# EAGLE board Ocreeb MK 2 _core _pcb (EAGLE 9.7.0)
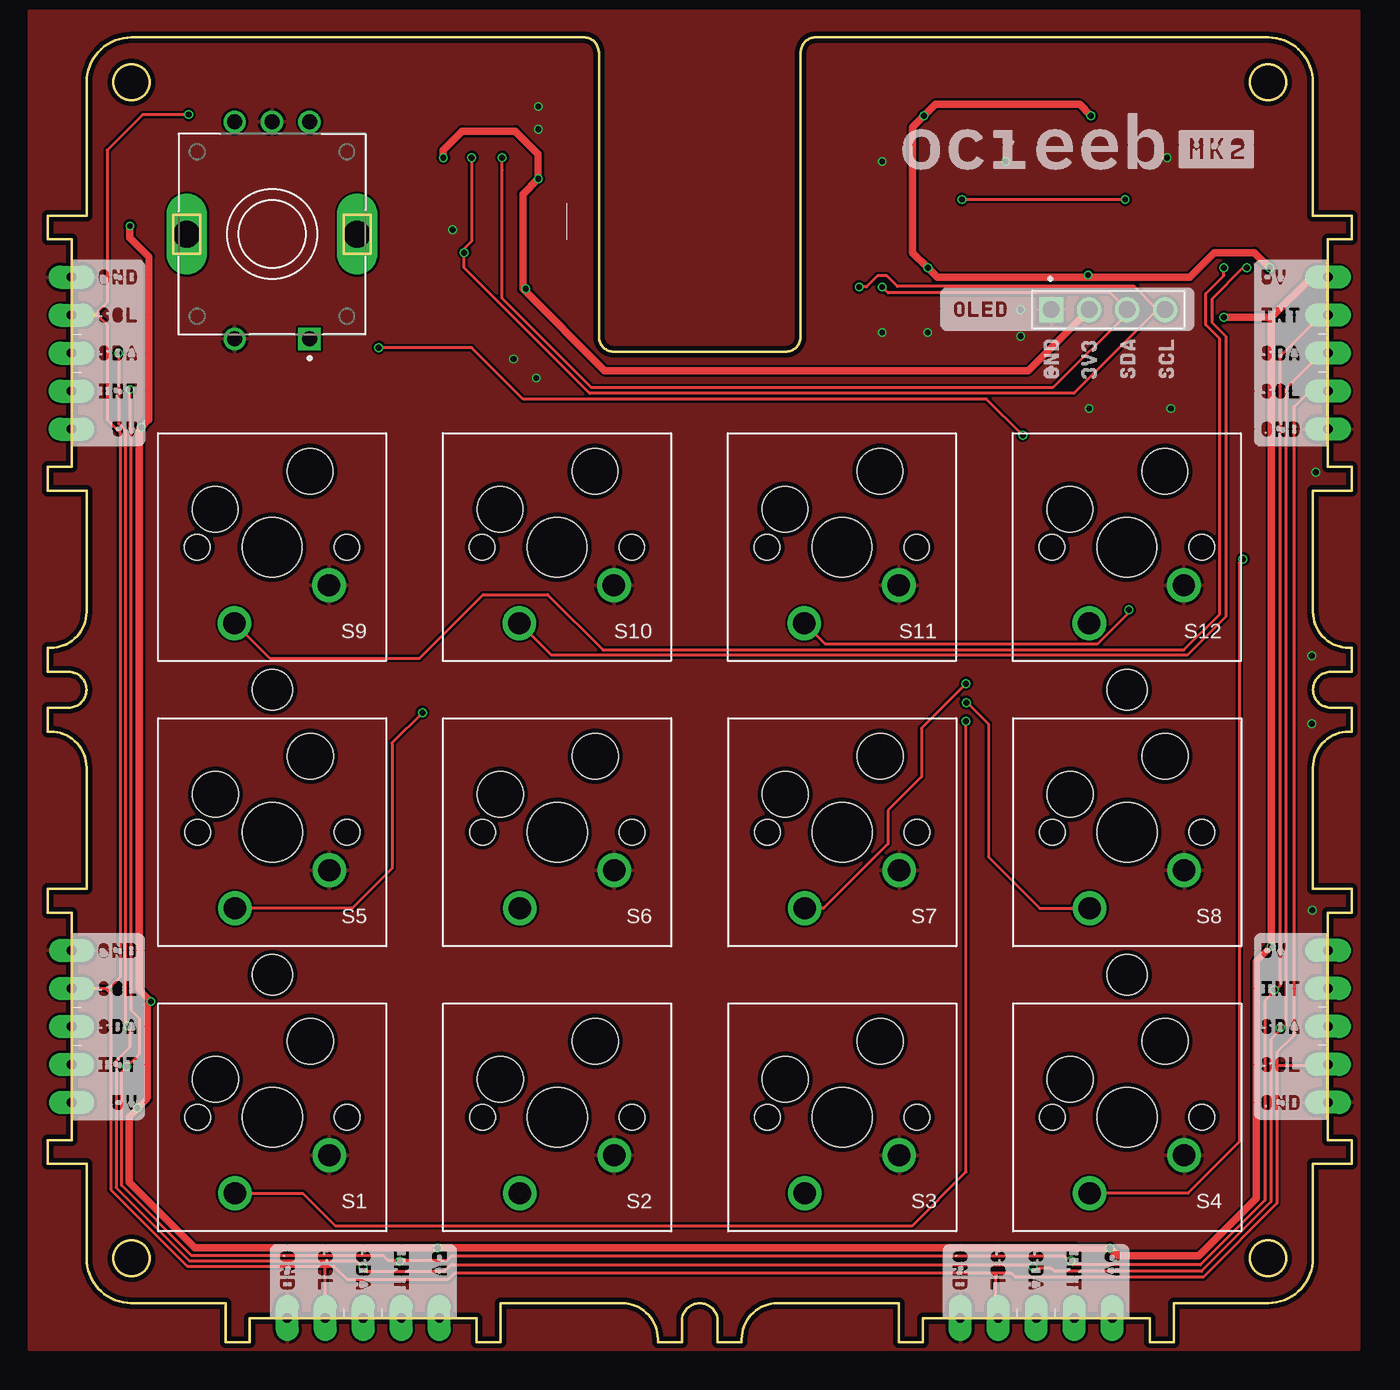
[diagram p0: board, top side]
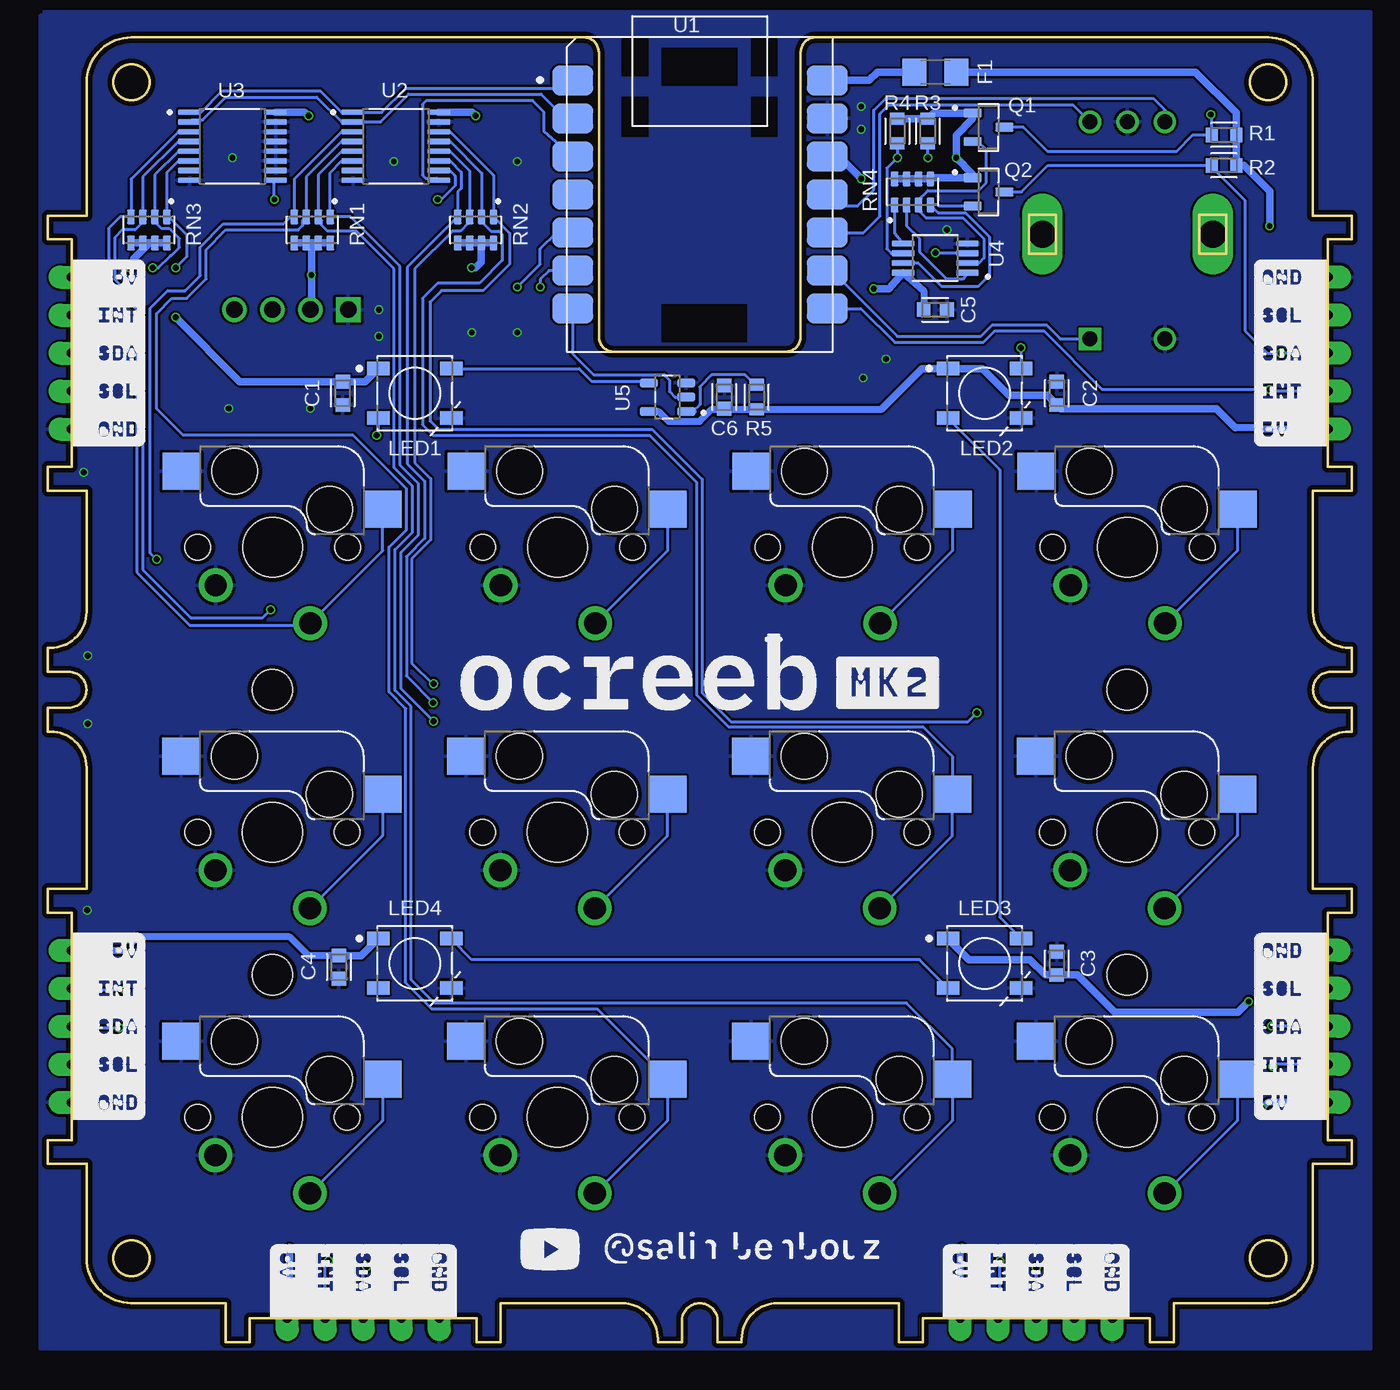
[diagram p1: board, bottom side, seen from below]

Size 87.2 x 87.2 mm. Coordinates in mm from the lower left corner, seen from the top.
Outline: 19.8,72.75 19.8,75.36 21.61,75.36 21.61,72.75 19.8,72.75
Outline: 8.41,72.75 8.41,75.36 10.2,75.36 10.2,72.75 8.41,72.75
Outline: 2.6,38.4 2.6,30.3 0,30.3 0,28.7 1.6,28.7 1.6,13.51 0,13.51 0,11.91 2.6,11.91 2.6,5.6 arc90 5.6,2.6 11.91,2.6 11.91,0 13.51,0 13.51,1.6 28.7,1.6 28.7,0 30.3,0 30.3,2.6 38.4,2.6 arc-90 40.8,0.2 40.8,0 42.4,0 42.4,1.4 arc-180 44.8,1.4 44.8,0 46.4,0 46.4,0.2 arc-90 48.8,2.6 56.91,2.6 56.91,0 58.51,0 58.51,1.6 73.69,1.6 73.69,0 75.3,0 75.3,2.6 81.6,2.6 arc90 84.6,5.6 84.6,11.91 87.2,11.91 87.2,13.51 85.6,13.51 85.6,28.7 87.2,28.7 87.2,30.3 84.6,30.3 84.6,38.4 arc-90 87,40.8 87.2,40.8 87.2,42.4 85.8,42.4 arc-180 85.8,44.8 87.2,44.8 87.2,46.4 87,46.4 arc-90 84.6,48.8 84.6,56.91 87.2,56.91 87.2,58.51 85.6,58.51 85.6,73.69 87.2,73.69 87.2,75.3 84.6,75.3 84.6,84.2 arc90 81.6,87.2 51.35,87.2 arc90 50.35,86.2 50.35,67.2 arc-90 49.35,66.2 37.85,66.2 arc-90 36.85,67.2 36.85,86.2 arc90 35.85,87.2 5.6,87.2 arc90 2.6,84.2 2.6,75.3 0,75.3 0,73.69 1.6,73.69 1.6,58.51 0,58.51 0,56.91 2.6,56.91 2.6,48.8 arc-90 0.2,46.4 0,46.4 0,44.8 1.4,44.8 arc-180 1.4,42.4 0,42.4 0,40.8 0.2,40.8 arc-90 2.6,38.4
Outline: circle at 5.6,5.6 radius 1.2
Outline: circle at 5.6,84.2 radius 1.2
Outline: circle at 81.6,5.6 radius 1.2
Outline: circle at 81.6,84.2 radius 1.2
Copper layers (1*16): Top 0.035mm / dielectric 1.5mm / Bottom 0.035mm
Design rules "PCBWay_2L_100um-Track *": minimum track width 0.1mm, minimum drill 0.3mm, track to track 0.1mm, track to pad 0.1mm, pad to pad 0.1mm, via to via 0.1mm, smd to smd 0mil, copper to edge 0.3mm, drill to drill 10mil, minimum pad ring 6mil, minimum via ring 0.1mm, stop-mask expansion 2mil, vias tented up to drill 0.45mm, thermal gap 0.2mm
Net classes: 0 default: width 0.203 mm, drill 0.381 mm, clearance 0.152 mm; 1 power: width 0.457 mm, drill 0.381 mm, clearance 0.152 mm
Holes 2.7 mm at 72.17,43.6 15.03,43.6 15.03,24.55 72.17,24.55

## Footprints (pad centres in the part's own frame; a part is rotated, then mirrored left to right if it is on the bottom)
CAPC1608X85 = smd 0.921 x 0.97: 1 -0.775,0; 2 0.775,0
PEC11R-4215F-S0024 = drill 1 square: 1 -2.5,7 | drill 1: 2 2.5,7; A -2.5,-7.5; B 2.5,-7.5; C 0,-7.5 | drill 1.8 long: P1 -5.7,0; P2 5.7,0
1206 = smd 1.6 x 1.8: 1 -1.4,0; 2 1.4,0
WS2812B = smd 1.5 x 0.9: 1 -2.45,1.65; 2 -2.45,-1.65; 3 2.45,-1.65; 4 2.45,1.65
61300411121 = drill 1.1 square: 1 -3.81,0 | drill 1.1: 2 -1.27,0; 3 1.27,0; 4 3.81,0
SOT95P240X111-3N = smd 1.23 x 0.6: 1 -1.06,0.95; 2 -1.06,-0.95; 3 1.06,0
RESC1608X60 = smd 0.799 x 0.974: 1 -0.815,0; 2 0.815,0
RESCAF80P320X160X60-8N = smd 0.97 x 0.53: 1 -0.875,1.2; 2 -0.875,0.4; 3 -0.875,-0.4; 4 -0.875,-1.2; 5 0.875,-1.2; 6 0.875,-0.4; 7 0.875,0.4; 8 0.875,1.2
CHERRY_MX1A-11NN_SWITCH = smd 2.55 x 2.5 bottom: 1 -6.09,-5.08; 2 7.36,-2.54 | drill 1.5: 1_ALT -3.81,2.54; 2_ALT 2.51,5.08 | hole 3.988: 0,0 | hole 1.7: 5,0; -5,0 | hole 3.048: -2.54,-5.08; 3.81,-2.54
MOUDLE14P-SMD-2.54-21X17.8MM = smd 2.75 x 2: 1 0.403,18.12; 2 0.403,15.58; 3 0.403,13.04; 4 0.403,10.5; 5 0.403,7.96; 6 0.403,5.42; 7 0.403,2.88; 8 17.432,2.88; 9 17.432,5.42; 10 17.432,7.96; 11 17.432,10.5; 12 17.432,13.04; 13 17.432,15.58; 14 17.432,18.12
SOP65P640X120-16N = smd 1.524 x 0.381: 1 -2.87,2.275; 2 -2.87,1.625; 3 -2.87,0.975; 4 -2.87,0.325; 5 -2.87,-0.325; 6 -2.87,-0.975; 7 -2.87,-1.625; 8 -2.87,-2.275; 9 2.87,-2.275; 10 2.87,-1.625; 11 2.87,-0.975; 12 2.87,-0.325; 13 2.87,0.325; 14 2.87,0.975; 15 2.87,1.625; 16 2.87,2.275
SOP65P490X110-8N = smd 1.524 x 0.419: 1 -2.15,0.975; 2 -2.15,0.325; 3 -2.15,-0.325; 4 -2.15,-0.975; 5 2.15,-0.975; 6 2.15,-0.325; 7 2.15,0.325; 8 2.15,0.975
SOT95P280X145-5N = smd 1.21 x 0.59: 1 -1.255,0.95; 2 -1.255,0; 3 -1.255,-0.95; 4 1.255,-0.95; 5 1.255,0.95
5_POGO_EDGE = drill 0.65 pad 1.524 long: 1 -5.08,0; 2 -2.54,0; 3 0,0; 4 2.54,0; 5 5.08,0

## Placement (x,y rotation side)
C1  0.1uF  [CAPC1608X85]  67.48,63.41 90 bottom
C2  0.1uF  [CAPC1608X85]  19.72,63.41 270 bottom
C3  0.1uF  [CAPC1608X85]  19.72,25.31 270 bottom
C4  0.1uF  [CAPC1608X85]  67.73,25.06 90 bottom
C5  0.1uF  [CAPC1608X85]  27.85,69 180 bottom
C6  0.1uF  [CAPC1608X85]  41.96,63.16 270 bottom
ENC  PEC11R-4215F-S0024  [PEC11R-4215F-S0024]  15.01,74.05 180 top
F1  6V/0.75A  [1206]  27.85,84.88 0 bottom
LED1  WS2812B  [WS2812B]  62.65,63.41 0 bottom
LED2  WS2812B  [WS2812B]  24.55,63.41 0 bottom
LED3  WS2812B  [WS2812B]  24.55,25.31 0 bottom
LED4  WS2812B  [WS2812B]  62.65,25.31 0 bottom
OLED  61300411121  [61300411121]  70.91,69 0 top
Q1  BSS138  [SOT95P240X111-3N]  24.3,81.19 0 bottom
Q2  BSS138  [SOT95P240X111-3N]  24.3,76.87 0 bottom
R1  10K  [RESC1608X60]  8.55,80.68 0 bottom
R2  10K  [RESC1608X60]  8.55,78.65 0 bottom
R3  10K  [RESC1608X60]  28.36,80.94 90 bottom
R4  10K  [RESC1608X60]  30.39,80.94 90 bottom
R5  10K  [RESC1608X60]  39.79,63.16 270 bottom
RN1  CAY16-103J4LF  [RESCAF80P320X160X60-8N]  69.51,74.33 270 bottom
RN2  CAY16-103J4LF  [RESCAF80P320X160X60-8N]  58.59,74.33 270 bottom
RN3  CAY16-103J4LF  [RESCAF80P320X160X60-8N]  80.43,74.33 270 bottom
RN4  CAY16-103J4LF  [RESCAF80P320X160X60-8N]  29.38,76.87 90 bottom
S1  MX1A-11NN  [CHERRY_MX1A-11NN_SWITCH]  15.03,15.03 180 top
S2  MX1A-11NN  [CHERRY_MX1A-11NN_SWITCH]  34.08,15.03 180 top
S3  MX1A-11NN  [CHERRY_MX1A-11NN_SWITCH]  53.12,15.03 180 top
S4  MX1A-11NN  [CHERRY_MX1A-11NN_SWITCH]  72.17,15.03 180 top
S5  MX1A-11NN  [CHERRY_MX1A-11NN_SWITCH]  15.03,34.08 180 top
S6  MX1A-11NN  [CHERRY_MX1A-11NN_SWITCH]  34.08,34.08 180 top
S7  MX1A-11NN  [CHERRY_MX1A-11NN_SWITCH]  53.12,34.08 180 top
S8  MX1A-11NN  [CHERRY_MX1A-11NN_SWITCH]  72.17,34.08 180 top
S9  MX1A-11NN  [CHERRY_MX1A-11NN_SWITCH]  15.01,53.12 180 top
S10  MX1A-11NN  [CHERRY_MX1A-11NN_SWITCH]  34.05,53.12 180 top
S11  MX1A-11NN  [CHERRY_MX1A-11NN_SWITCH]  53.11,53.12 180 top
S12  MX1A-11NN  [CHERRY_MX1A-11NN_SWITCH]  72.16,53.12 180 top
U1  [MOUDLE14P-SMD-2.54-21X17.8MM]  52.5,66.2 0 bottom
U2  SN74HC165DBR16-TSSOP  [SOP65P640X120-16N]  63.92,79.92 0 bottom
U3  SN74HC165DBR16-TSSOP  [SOP65P640X120-16N]  74.84,79.92 0 bottom
U4  TCA4307DGKR  [SOP65P490X110-8N]  27.85,72.44 180 bottom
U5  SN74AHCT1G126DBVR  [SOT95P280X145-5N]  45.76,63.16 180 bottom
U$1  5PIN_EDGE  [5_POGO_EDGE]  1.6,66.1 90 top
U$2  5PIN_EDGE  [5_POGO_EDGE]  1.61,21.1 90 top
U$3  5PIN_EDGE  [5_POGO_EDGE]  85.6,21.1 270 top
U$4  5PIN_EDGE  [5_POGO_EDGE]  21.1,1.6 180 top
U$5  5PIN_EDGE  [5_POGO_EDGE]  66.1,1.6 180 top
U$6  5PIN_EDGE  [5_POGO_EDGE]  85.6,66.1 270 top

## Library data of the parts
C1-C6 = Capacitor; CATEGORY: Capacitor
ENC = Switch; CREATED_BY: PCBLayout.com; DIGIKEY_PART_NUMBER: PEC11R-4215F-S0024-ND; MANUFACTURER: Bourns Inc.; MPN: PEC11R-4215F-S0024
F1 = SparkFun-Fuses; PROD_ID: RES-11150
LED1-LED4 = WS2812B; CATEGORY: LED; COLOR: RGB; DESCRIPTION: LED integrated light source; MANUFACTURER: Worldsemi; MPN: WS2812B; OPERATING_TEMP: -25 ℃ to +80℃(TJ); PART_STATUS: Active; SUB_CATEGORY: RGB
OLED = Headers; CREATED_BY: PCBLayout.com; DIGI_KEY_PART_NUMBER: 732-5317-ND; MANUFACTURER: Wurth Electronics Inc.; MPN: 61300411121
Q1 Q2 = BSS138; AVAILABILITY: In Stock; CHECK_PRICES: https://www.snapeda.com/parts/BSS138/Onsemi/view-part/?ref=eda; DESCRIPTION: N-Channel 50 V 220mA (Ta) 360mW (Ta) Surface Mount SOT-23-3; MF: onsemi; MP: BSS138; PACKAGE: None; PRICE: None; SNAPEDA_LINK: https://www.snapeda.com/parts/BSS138/Onsemi/view-part/?ref=snap
R1-R5 = Resistor; CATEGORY: Resistor; SUB-CATEGORY: Fixed
RN1-RN4 = CAY16-103J4LF; CHECK_PRICES: https://www.snapeda.com/parts/CAY16-103J4LF/Bourns+-+J.W.+Miller/view-part/?ref=eda; DESCRIPTION: Resistor, Chip Array,10 Kilohms,62 mW,+ 5%,50 V (Max.) | Bourns CAY16-103J4LF; DIGIKEY_PART_NUMBER: CAY16-103J4LFTR-ND; MF: Bourns; MP: CAY16-103J4LF; PACKAGE: 1206 Bourns; PURCHASE-URL: https://www.snapeda.com/api/url_track_click_mouser/?unipart_id=47136&manufacturer=Bourns&part_name=CAY16-103J4LF&search_term=None; SNAPEDA_LINK: https://www.snapeda.com/parts/CAY16-103J4LF/Bourns+-+J.W.+Miller/view-part/?ref=snap
S1-S12 = MX Switch; AVAILABILITY: In Stock; CHECK_PRICES: https://www.snapeda.com/parts/MX1A11NN/Cherry/view-part/?ref=eda; DESCRIPTION: SWITCH, TACTILE, SPST-NO, 10mA, THOUGH HOLE; Product Range:MX Series; Actuator Orientation:Top Actuated; Switch Mounting:Surface Mount; Actuator Style:Plunger for Cap; Actuating Force:59.5gf; Contact Rating:10mA at 12VDC RoHS Compliant: No; MF: Cherry; MP: MX1A11NN; PACKAGE: None; PRICE: None; SNAPEDA_LINK: https://www.snapeda.com/parts/MX1A11NN/Cherry/view-part/?ref=snap
U1 = XIAO RP2040
U2 U3 = ul_SN74HC165DBR
U4 = TCA4307DGKR; AVAILABILITY: In Stock; CHECK_PRICES: https://www.snapeda.com/parts/TCA4307DGKR/Texas+Instruments/view-part/?ref=eda; DESCRIPTION: 2-bit bidirectional 2.3- to 5.5-V hot swappable 400-kHz I2C/SMBus buffer with Stuck Bus Recovery; MF: Texas Instruments; MP: TCA4307DGKR; PACKAGE: None; PRICE: None; PURCHASE-URL: https://pricing.snapeda.com/search?q=TCA4307DGKR&ref=eda; SNAPEDA_LINK: https://www.snapeda.com/parts/TCA4307DGKR/Texas+Instruments/view-part/?ref=snap
U5 = SN74AHCT1G126; CHECK_PRICES: https://www.snapeda.com/parts/SN74AHCT1G126DBVR/Texas+Instruments/view-part/?ref=eda; DESCRIPTION: Single 4.5-V to 5.5-V buffer with TTL-compatible CMOS inputs and 3-state outputs; DIGIKEY_PART_NUMBER: 296-4710-2-ND; MF: Texas Instruments; MP: SN74AHCT1G126DBVR; PACKAGE: SOT-23-5 Texas Instruments; PURCHASE-URL: https://www.snapeda.com/api/url_track_click_mouser/?unipart_id=420895&manufacturer=Texas Instruments&part_name=SN74AHCT1G126DBVR&search_term=None; SNAPEDA_LINK: https://www.snapeda.com/parts/SN74AHCT1G126DBVR/Texas+Instruments/view-part/?ref=snap
U$1-U$6 = OCREEB_POGO_CON

## Nets
3.3V [power]: C5.2 OLED.2 Q1.1 Q2.1 R3.2 R4.2 RN1.5 RN1.6 RN1.7 RN1.8 RN2.5 RN2.6 RN2.7 RN2.8 RN3.5 RN3.6 RN3.7 RN3.8 RN4.5 RN4.6 RN4.7 RN4.8 U1.12 U2.16 U3.16 U4.8
5V [power]: C1.2 C2.2 C3.2 C4.2 C6.2 F1.2 LED1.1 LED2.1 LED3.1 LED4.1 R1.2 R2.2 R5.2 U5.5 U$1.1 U$2.1 U$3.1 U$4.1 U$5.1 U$6.1
CLK: U1.2 U2.2 U3.2
ENC_A: ENC.A U1.10
ENC_B: ENC.B U1.11
ENC_SW: ENC.1 U1.9
GND [power]: C1.1 C2.1 C3.1 C4.1 C5.1 C6.1 ENC.2 ENC.C LED1.3 LED2.3 LED3.3 LED4.3 OLED.1 S1.1 S1.1_ALT S2.1 S2.1_ALT S3.1 S3.1_ALT S4.1 S4.1_ALT S5.1 S5.1_ALT S6.1 S6.1_ALT S7.1 S7.1_ALT S8.1 S8.1_ALT S9.1 S9.1_ALT S10.1 S10.1_ALT S11.1 S11.1_ALT S12.1 S12.1_ALT U1.13 U2.8 U2.15 U3.8 U3.10 U3.11 U3.12 U3.13 U3.14 U3.15 U4.4 U5.3 U$1.5 U$2.5 U$3.5 U$4.5 U$5.5 U$6.5
INTR: U1.8 U$1.2 U$2.2 U$3.2 U$4.2 U$5.2 U$6.2
LD: U1.1 U2.1 U3.1
N$1: RN4.1 U4.5
N$2: R5.1 U5.1
N$3: LED1.2 LED2.4
N$12: LED2.2 LED3.4
N$13: LED3.2 LED4.4
N$15: RN4.2 U4.1
PIXEL: U1.7 U5.2
PIXEL_5V: LED1.4 U5.4
SCL: OLED.4 R3.1 U1.6 U4.3
SCL_OUT: Q1.2 RN4.3 U4.2
SCL_OUT_5V: Q1.3 R1.1 U$1.4 U$2.4 U$3.4 U$4.4 U$5.4 U$6.4
SDA: OLED.3 R4.1 U1.5 U4.6
SDA_OUT: Q2.2 RN4.4 U4.7
SDA_OUT_5V: Q2.3 R2.1 U$1.3 U$2.3 U$3.3 U$4.3 U$5.3 U$6.3
SER: U2.10 U3.9
SH_DATA: U1.3 U2.9
SW1: RN1.1 S1.2 S1.2_ALT U2.6
SW2: RN1.2 S2.2 S2.2_ALT U2.5
SW3: RN1.3 S3.2 S3.2_ALT U2.4
SW4: RN1.4 S4.2 S4.2_ALT U2.3
SW5: RN2.1 S5.2 S5.2_ALT U2.14
SW6: RN2.2 S6.2 S6.2_ALT U2.13
SW7: RN2.3 S7.2 S7.2_ALT U2.12
SW8: RN2.4 S8.2 S8.2_ALT U2.11
SW9: RN3.1 S9.2 S9.2_ALT U3.6
SW10: RN3.2 S10.2 S10.2_ALT U3.5
SW11: RN3.3 S11.2 S11.2_ALT U3.4
SW12: RN3.4 S12.2 S12.2_ALT U3.3
USB_5V [power]: F1.1 U1.14

## Tracks (layer width: path | path; a pad name or v marks a point on that pad's centre or on a via)
3.3V  (via drill 0.38, 0.4)
  Top 0.508: v81.7,71.79 80.68,72.81 78.02,72.81 76.37,71.16 69.56,71.16 | 69.56,71.16 59.48,71.16 v58.84,71.79 57.82,72.81 57.82,81.19 v58.59,81.95 59.35,82.72 69,82.72 v69.76,81.95 | OLED.2 65.57,64.94 37.25,64.94 31.79,70.4 | v26.46,79.16 26.46,79.67 27.73,80.94 31.26,80.94 32.8,79.4 v32.8,77.75 31.79,76.73 31.79,70.4 | v69.56,71.31 69.56,71.16 | 31.79,70.4 v31.97,70.4
  Bottom 0.457: U4.8 28.61,70.23 28.61,69.02 C5.2 | Q2.1 25.36,78.06
  Bottom 0.508: R4.2 R3.2 27.97,82.14 Q1.1 25.36,81.76 26.46,80.66 v26.46,79.16 25.36,78.06 | RN3.7 RN3.5 RN3.6 | RN3.7 RN3.8 | Q2.1 28.1,77.82 RN4.5 RN4.6 RN4.8 RN4.7 | v58.84,71.79 58.59,71.79 58.2,72.17 58.2,73.46 RN2.7 | 69.56,73.46 RN1.5 RN1.6 | RN1.8 RN1.7 69.56,73.46 | RN2.7 RN2.8 | RN2.7 RN2.5 RN2.6 | v81.7,71.79 81.45,72.05 81.45,72.4 80.38,73.46 RN3.7 | U3.16 70,82.2 v69.76,81.95 | U2.16 58.83,82.2 v58.59,81.95 | U1.12 34.94,79.11 34.17,79.11 v32.8,77.75 | 69.56,73.46 v69.56,71.31 69.56,69.7 69.64,69.64 OLED.2 | v31.97,70.4 30.95,70.4 U4.8
5V  (via drill 0.38, 0.4)
  Top 0.457: 6.77,72.56 6.77,61.63 v6.26,61.13 | v6.01,15.64 6.64,16.27 6.64,22.52 v6.9,22.77 6.11,23.56 6.11,23.61 | 5.44,15.07 v6.01,15.64 | v6.01,15.64 | 80.82,25.45 v81.81,26.44
  Top 0.508: 81.83,68.49 81.83,64.12 81.81,64.11 v81.81,26.44 | 6.77,72.56 5.5,73.83 v5.5,74.59 | U$6.1 84.52,71.18 81.83,68.49 | v78.65,68.49 81.83,68.49 | v6.26,61.13 6.11,60.97 6.11,23.61 | 5.44,15.07 5.44,10.69 9.84,6.29 v26.07,6.29 68.77,6.29 68.81,6.26 v71.03,6.26 71.54,5.75 76.95,5.75 80.82,9.62 80.82,25.45
  Bottom 0.457: 31.42,62.38 31.46,62.34 R5.2 42.01,62.34 42.8,62.34 43.6,61.53 45.69,61.53 46.36,62.21 U5.5 | U$1.1 6.16,61.02 v6.26,61.13 7.79,61.13 | U$2.1 5.63,16.02 v6.01,15.64 | U$4.1 26.18,6.19 v26.07,6.29 | C4.2 69.75,25.83 69.76,25.82 71.03,27.09 81.17,27.09 v81.81,26.44 82.08,26.18 U$3.1
  Bottom 0.508: C4.2 66.23,25.83 LED4.1 | LED1.1 65.97,64.19 C1.2 74.35,64.19 v78.65,68.49 | LED3.1 25.6,25.57 21.52,25.57 20.49,24.54 C3.2 18.36,24.54 15.86,22.03 7.63,22.03 v6.9,22.77 | 31.42,62.38 28.74,65.06 LED2.1 24.71,65.06 22.92,63.27 20.36,63.27 C2.2 19.48,62.4 9.06,62.4 7.79,61.13 | U$5.1 71.03,1.75 v71.03,6.26 | C6.2 42.01,62.34 | F1.2 10.45,84.88 7.73,82.16 R1.2 R2.2 7.23,78.65 5.5,76.93 v5.5,74.59
CLK
  Bottom 0.203: U3.2 77.57,81.69 76.83,81.69 75.3,83.22 69.21,83.22 67.55,81.55 U2.2 64.93,81.55 63.07,83.41 54.2,83.41 52.32,81.53 U1.2
ENC_A
  Bottom 0.203: U1.10 32.66,74.16 31.55,75.26 31.55,82.09 30.95,82.7 18.65,82.7 ENC.A
ENC_B
  Bottom 0.203: ENC.B 12.51,82.36 13.28,83.13 31.16,83.13 31.96,82.33 31.96,77.03 33.05,75.94 34.31,75.94 U1.11
ENC_SW
  Bottom 0.203: U1.9 34.99,71.54 34.71,71.54 30.39,67.22 24.8,67.22 24.04,67.98 20.42,67.98 19.49,67.06 ENC.1
GND  (via drill 0.38, 0.4)
  other vias: 84.54,28.87 84.51,41.31 84.51,45.89 84.8,58.12 64.05,78.91 74.84,79.16 55.79,78.91 27.09,74.33 65.06,67.22 65.06,69 69.64,62.4 75.1,62.4 31.15,65.7 32.68,64.43 55.79,67.48 58.84,67.48 32.8,82.59 32.8,81.06
  pour Bottom: 87.69,-0.49 87.69,88.71 87.52,88.71 87.48,88.73 87.46,88.75 87.44,88.79 87.44,88.96 -1.26,88.96 -1.26,-0.49
  pour Top: -1.26,-0.49 87.69,-0.49 87.69,88.96 -1.26,88.96
INTR  (via drill 0.38, 0.4)
  Top 0.203: U$6.2 85.17,68.64 82.39,65.86 82.39,63.89 82.37,63.88 82.37,23.8 82.08,23.51 | 23.53,5.45 22.77,5.45 22.44,5.79 9.63,5.79 4.94,10.48 4.94,18.06 v5.29,18.41 6.11,19.24 6.11,21.65 5.55,22.21 5.55,61.07 5.5,61.12 v5.5,63.67 | 82.08,23.51 82.08,23.5 81.38,22.8 81.38,9.46 77.08,5.16 68.56,5.16 68.42,5.3 | 82.08,23.51 82.05,23.53 v82.02,23.53 | 23.53,5.45 26.67,5.45 26.96,5.75 67.97,5.75 68.42,5.3 | 23.53,5.45 v23.53,5.4 | 68.42,5.3 v68.42,5.43
  Bottom 0.203: U$3.2 85.49,23.53 v82.02,23.53 | U$5.2 68.64,5.26 68.5,5.4 68.45,5.4 v68.42,5.43 | U$4.2 23.53,1.71 v23.53,5.4 | U1.8 32.83,69.08 30.56,66.82 24.64,66.82 23.87,67.58 20.59,67.58 16.68,63.67 v5.5,63.67 5.39,63.56 U$1.2 | U$2.2 5.14,18.56 v5.29,18.41
LD
  Bottom 0.203: U3.1 76.95,82.2 75.53,83.62 68.98,83.62 67.55,82.2 U2.1 64.86,82.2 63.23,83.82 52.34,83.82 U1.1
N$1
  Bottom 0.203: RN4.1 30.55,75.97 30.55,74.09 U4.5
N$2
  Bottom 0.203: 44.04,62.21 43.6,62.65 43.6,63.85 42.8,64.65 40.59,64.65 39.92,63.97 R5.1
  Bottom 0.457: 44.04,62.21 U5.1
N$3  (via drill 0.4)
  Top 0.203: v65.19,60.62 62.78,63.03 31.79,63.03 28.36,66.46 v22.14,66.46
  Bottom 0.203: LED1.2 65.1,60.71 v65.19,60.62 | v22.14,66.46 22.1,66.42 LED2.4
N$12
  Bottom 0.203: LED2.2 23.53,58.3 23.53,28.4 LED3.4
N$13
  Bottom 0.203: LED4.4 60.2,26.93 58.84,25.57 28.9,25.57 LED3.2
N$15
  Bottom 0.203: U4.1 25.98,71.06 27.11,71.06 28.89,72.84 28.89,73.73 29.75,74.59 29.75,75.97 RN4.2
PIXEL
  Bottom 0.203: U5.2 45.25,63.16 45.63,63.54 45.63,64.3 45.99,64.66 50.69,64.66 52.1,66.07 U1.7
PIXEL_5V
  Bottom 0.203: LED1.4 51.67,65.06 50.84,64.23 47.14,64.23 U5.4
SCL  (via drill 0.38, 0.4)
  Top 0.203: 74.21,69 68.62,63.41 36.23,63.41 27.85,71.79 v27.85,72.81 27.85,73.08 28.35,73.58 v28.35,79.15 v28.36,79.16 | OLED.4 74.21,69 | 74.21,69 72.64,70.57 56.81,70.57 56.11,71.26 55.49,71.26 54.75,70.52 v54.27,70.52
  Bottom 0.203: v28.36,79.16 R3.1 | v27.85,72.81 25.62,72.81 U4.3 | v54.27,70.52 54.27,71.03 53.68,71.62 U1.6
SCL_OUT
  Bottom 0.203: Q1.2 25,80.24 24.44,79.68 24.44,77.5 24.97,76.96 28.36,76.96 29,76.32 29,76.02 RN4.3 29,75.97 29,75.67 28.47,75.14 25.99,75.14 24.59,73.73 24.59,72.46 24.93,72.12 U4.2
SCL_OUT_5V  (via drill 0.38)
  Top 0.203: 82.19,18.45 82.19,19.37 83.31,20.49 83.31,62.48 84.39,63.56 U$6.4 | 82.19,18.45 82.19,9.27 77.26,4.33 64.71,4.33 64.43,4.61 63.41,4.61 | 18.59,5.08 9.33,5.08 4.23,10.18 4.23,23.29 3.98,23.53 | 18.59,5.08 19.13,5.08 20.04,4.17 26.77,4.17 27.22,4.61 63.41,4.61 | U$5.4 63.41,1.75 63.41,4.61 | U$3.4 85.49,18.45 82.19,18.45 | 3.98,23.53 4.84,24.4 4.84,60.78 3.98,61.64 3.98,67.98 3.32,68.64 U$1.4 3.11,68.64 3.98,69.51 3.98,79.67 6.35,82.04 v9.43,82.04 | U$2.4 3.87,23.64 3.98,23.53 | U$4.4 18.56,5.05 18.59,5.08
  Bottom 0.203: Q1.3 21.97,81.19 20.34,79.57 11.75,79.57 10.63,80.68 R1.1 9.36,81.98 v9.43,82.04
SDA  (via drill 0.38, 0.4)
  Top 0.203: v55.8,70.51 56.2,70.12 66.07,70.12 66.11,70.16 71.02,70.16 OLED.3 72.17,68.75 67.22,63.79 36.36,63.79 30.39,69.76 30.39,78.34 v30.39,79.16
  Bottom 0.203: R4.1 v30.39,79.16 31.09,78.46 31.09,73.07 30.79,72.77 U4.6 | v55.8,70.51 54.27,72.05 54.27,73.06 53.17,74.16 U1.5
SDA_OUT
  Bottom 0.203: Q2.2 27.59,75.92 27.67,76 RN4.4 27.67,75.49 25.85,75.49 24.23,73.88 24.23,71.31 25,70.54 27.41,70.54 28.99,72.12 U4.7
SDA_OUT_5V  (via drill 0.38, 0.4)
  Top 0.203: U$6.3 85.17,66.1 82.78,63.71 82.78,21.15 82.64,21.01 82.64,20.99 82.54,20.99 | 82.54,20.99 81.79,20.25 81.79,9.37 77.15,4.72 67.33,4.72 67.11,4.94 65.86,4.94 | 82.54,20.99 v82.43,20.99 | v4.74,66.09 4.74,61.38 5.2,60.92 5.2,21.3 v5.37,21.12 5.5,20.99 5.5,19.71 4.58,18.79 4.58,10.33 9.48,5.43 20.64,5.43 v21.1,4.97 21.38,4.69 26.48,4.69 26.94,5.14 65.61,5.14 65.81,4.94 65.86,4.94 | 65.86,4.94 v65.86,5.04
  Bottom 0.203: U$3.3 85.49,20.99 v82.43,20.99 | U$5.3 66.1,4.64 65.86,4.88 v65.86,5.04 | Q2.3 22.09,76.87 20.32,78.65 R2.1 9.25,78.54 9.25,78.42 7.14,76.31 7.14,67.59 5.65,66.1 4.72,66.1 | U$4.3 v21.1,4.97 | U$1.3 4.72,66.1 | 4.72,66.1 v4.74,66.09 | U$2.3 5.35,21.1 v5.37,21.12
SER  (via drill 0.38)
  Top 0.203: v61.13,76.37 v72.05,76.37
  Bottom 0.203: U3.9 72.05,77.57 v72.05,76.37 | U2.10 61.04,78.28 60.3,78.28 59.96,77.95 59.96,77.28 60.87,76.37 v61.13,76.37
SH_DATA
  Bottom 0.203: U1.3 54.01,80.92 54.01,82.21 54.78,82.97 61.89,82.97 62.14,82.72 62.14,78 61.93,77.79 61.19,77.79 U2.9
SW1  (via drill 0.4)
  Top 0.203: S1.2_ALT 17.06,9.95 19.22,7.79 57.82,7.79 61.41,11.37 v61.41,41.5
  Bottom 0.203: U2.6 67.53,78.95 68.31,78.17 RN1.1 66.94,75.21 63.64,71.9 63.64,58.61 62.4,57.38 62.4,53.95 63.56,52.79 63.56,43.66 v61.41,41.5 | S1.2 7.66,14.8 S1.2_ALT
SW2
  Bottom 0.203: U2.5 67.53,79.6 69.11,78.02 RN1.2 68.88,74.98 68.88,74.64 68.49,74.25 66.56,74.25 64.05,71.73 64.05,58.45 62.81,57.21 62.81,54.12 63.97,52.96 63.97,43.56 62.9,42.49 62.9,24.22 61.33,22.65 29.77,22.65 26.71,19.6 S2.2 26.71,14.8 S2.2_ALT
SW3
  Bottom 0.203: U2.4 67.53,80.25 69.91,77.87 RN1.3 70.14,74.98 70.14,74.64 70.44,74.33 75.28,74.33 76.59,73.02 76.59,71.06 77.89,69.76 78.91,69.76 79.92,68.75 79.92,62.4 78.14,60.62 66.79,60.62 63.22,57.04 63.22,54.29 64.38,53.13 64.38,43.46 63.26,42.34 63.26,24.01 61.5,22.25 50.45,22.25 S3.2 45.77,14.8 S3.2_ALT
SW4  (via drill 0.4)
  Top 0.203: v79.92,52.33 79.67,52.07 79.67,13.37 76.24,9.95 S4.2_ALT
  Bottom 0.203: U2.3 67.53,80.9 70.71,77.72 RN1.4 70.96,75.21 71.43,74.74 75.45,74.74 77,73.19 77,71.28 78.01,70.27 79.16,70.27 80.33,69.1 80.33,52.73 v79.92,52.33 | S4.2 64.81,14.8 S4.2_ALT
SW5  (via drill 0.4)
  Top 0.203: v25.06,42.08 23.03,40.04 23.03,31.66 20.36,29 S5.2_ALT
  Bottom 0.203: U2.14 60.31,80.9 57.39,77.97 RN2.1 56.3,74.12 56.3,72.05 58.08,70.27 60.87,70.27 61.63,69.51 61.63,61.56 61.08,61.01 46.78,61.01 43.45,57.67 43.45,43.4 41.52,41.47 25.67,41.47 v25.06,42.08 | S5.2 7.66,33.84 S5.2_ALT
SW6
  Bottom 0.203: U2.13 60.31,80.25 58.19,78.12 RN2.2 58.19,74.87 57.57,74.25 57.03,74.25 56.82,74.03 56.82,72.29 58.33,70.78 61.13,70.78 62.14,69.76 62.14,61.31 61.43,60.6 46.95,60.6 43.8,57.45 43.8,43.25 41.66,41.11 28.66,41.11 26.71,39.16 S6.2 26.71,33.84 S6.2_ALT
SW7  (via drill 0.4)
  Top 0.203: v61.41,44.01 58.43,41.03 58.43,37.78 56.19,35.53 56.19,33.3 51.88,29 S7.2_ALT
  Bottom 0.203: U2.12 60.31,79.6 58.99,78.27 RN2.3 59.09,75.11 59.09,74.76 59.6,74.25 60.14,74.25 62.65,71.74 62.65,58.78 61.59,57.72 61.59,53.62 62.85,52.35 62.85,45.38 61.44,43.97 v61.41,44.01 | S7.2 45.77,33.84 S7.2_ALT
SW8  (via drill 0.4)
  Top 0.203: v61.43,42.74 61.45,42.77 62.9,41.32 62.9,32.42 66.33,29 S8.2_ALT
  Bottom 0.203: U2.11 60.31,78.95 59.55,78.19 59.55,77.11 59.79,76.88 RN2.4 63.16,71.84 63.16,58.71 62,57.55 62,53.71 63.21,52.5 63.21,44.53 v61.43,42.74 | S8.2 64.81,33.84 S8.2_ALT
SW9  (via drill 0.4)
  Top 0.203: v78.65,71.79 78.65,71.29 77.43,70.07 77.43,67.99 78.36,67.06 78.36,48.64 75.98,46.26 37.13,46.26 33.44,49.95 29.12,49.95 24.88,45.71 14.83,45.71 S9.2_ALT
  Bottom 0.203: U3.6 78.45,78.95 79.23,78.17 79.23,75.35 | 79.23,75.35 RN3.1 | S9.2 7.65,52.9 S9.2_ALT | v78.65,71.79 77.89,72.56 77.89,74.01 79.23,75.35
SW10  (via drill 0.4)
  Top 0.203: S10.2_ALT 33.68,45.91 76.2,45.91 78.77,48.47 78.77,67.23 77.84,68.16 77.84,69.71 79.92,71.79 v80.18,71.79
  Bottom 0.203: U3.5 78.45,79.6 80.03,78.02 RN3.2 79.92,75.1 79.92,74.76 79.58,74.42 79.05,74.42 78.4,73.77 78.4,73.15 78.94,72.61 78.99,72.61 79.8,71.79 v80.18,71.79 | S10.2 26.7,52.9 S10.2_ALT
SW11  (via drill 0.4)
  Top 0.203: S11.2_ALT 51.99,46.65 70.2,46.65 72.3,48.75 v72.3,48.93
  Bottom 0.203: U3.4 78.45,80.25 80.83,77.87 RN3.3 80.68,75.06 80.68,75.01 81.36,74.33 82.21,74.33 82.72,73.83 82.72,71.03 80.84,69.15 80.84,51.63 77.64,48.43 72.81,48.43 v72.3,48.93 | S11.2 45.75,55.54 45.75,52.9 S11.2_ALT
SW12
  Bottom 0.203: U3.3 78.45,80.9 81.63,77.72 RN3.4 82.35,75.21 83.12,74.44 83.12,70.86 81.24,68.98 81.24,51.46 77.7,47.92 69.77,47.92 S12.2_ALT 64.8,52.9 S12.2
USB_5V
  Bottom 0.508: U1.14 32.27,84.32 31.72,84.88 F1.1